# Altium PCB SignalGen_V5_RevC.PcbDoc
Units mm, origin at the board's own origin, x right, y up, seen from the top; angles counter-clockwise.
Board outline 80 x 80 mm, 2 copper layers (Top Layer, Bottom Layer); 43 components, 21 nets, 115 pads, 15 vias.
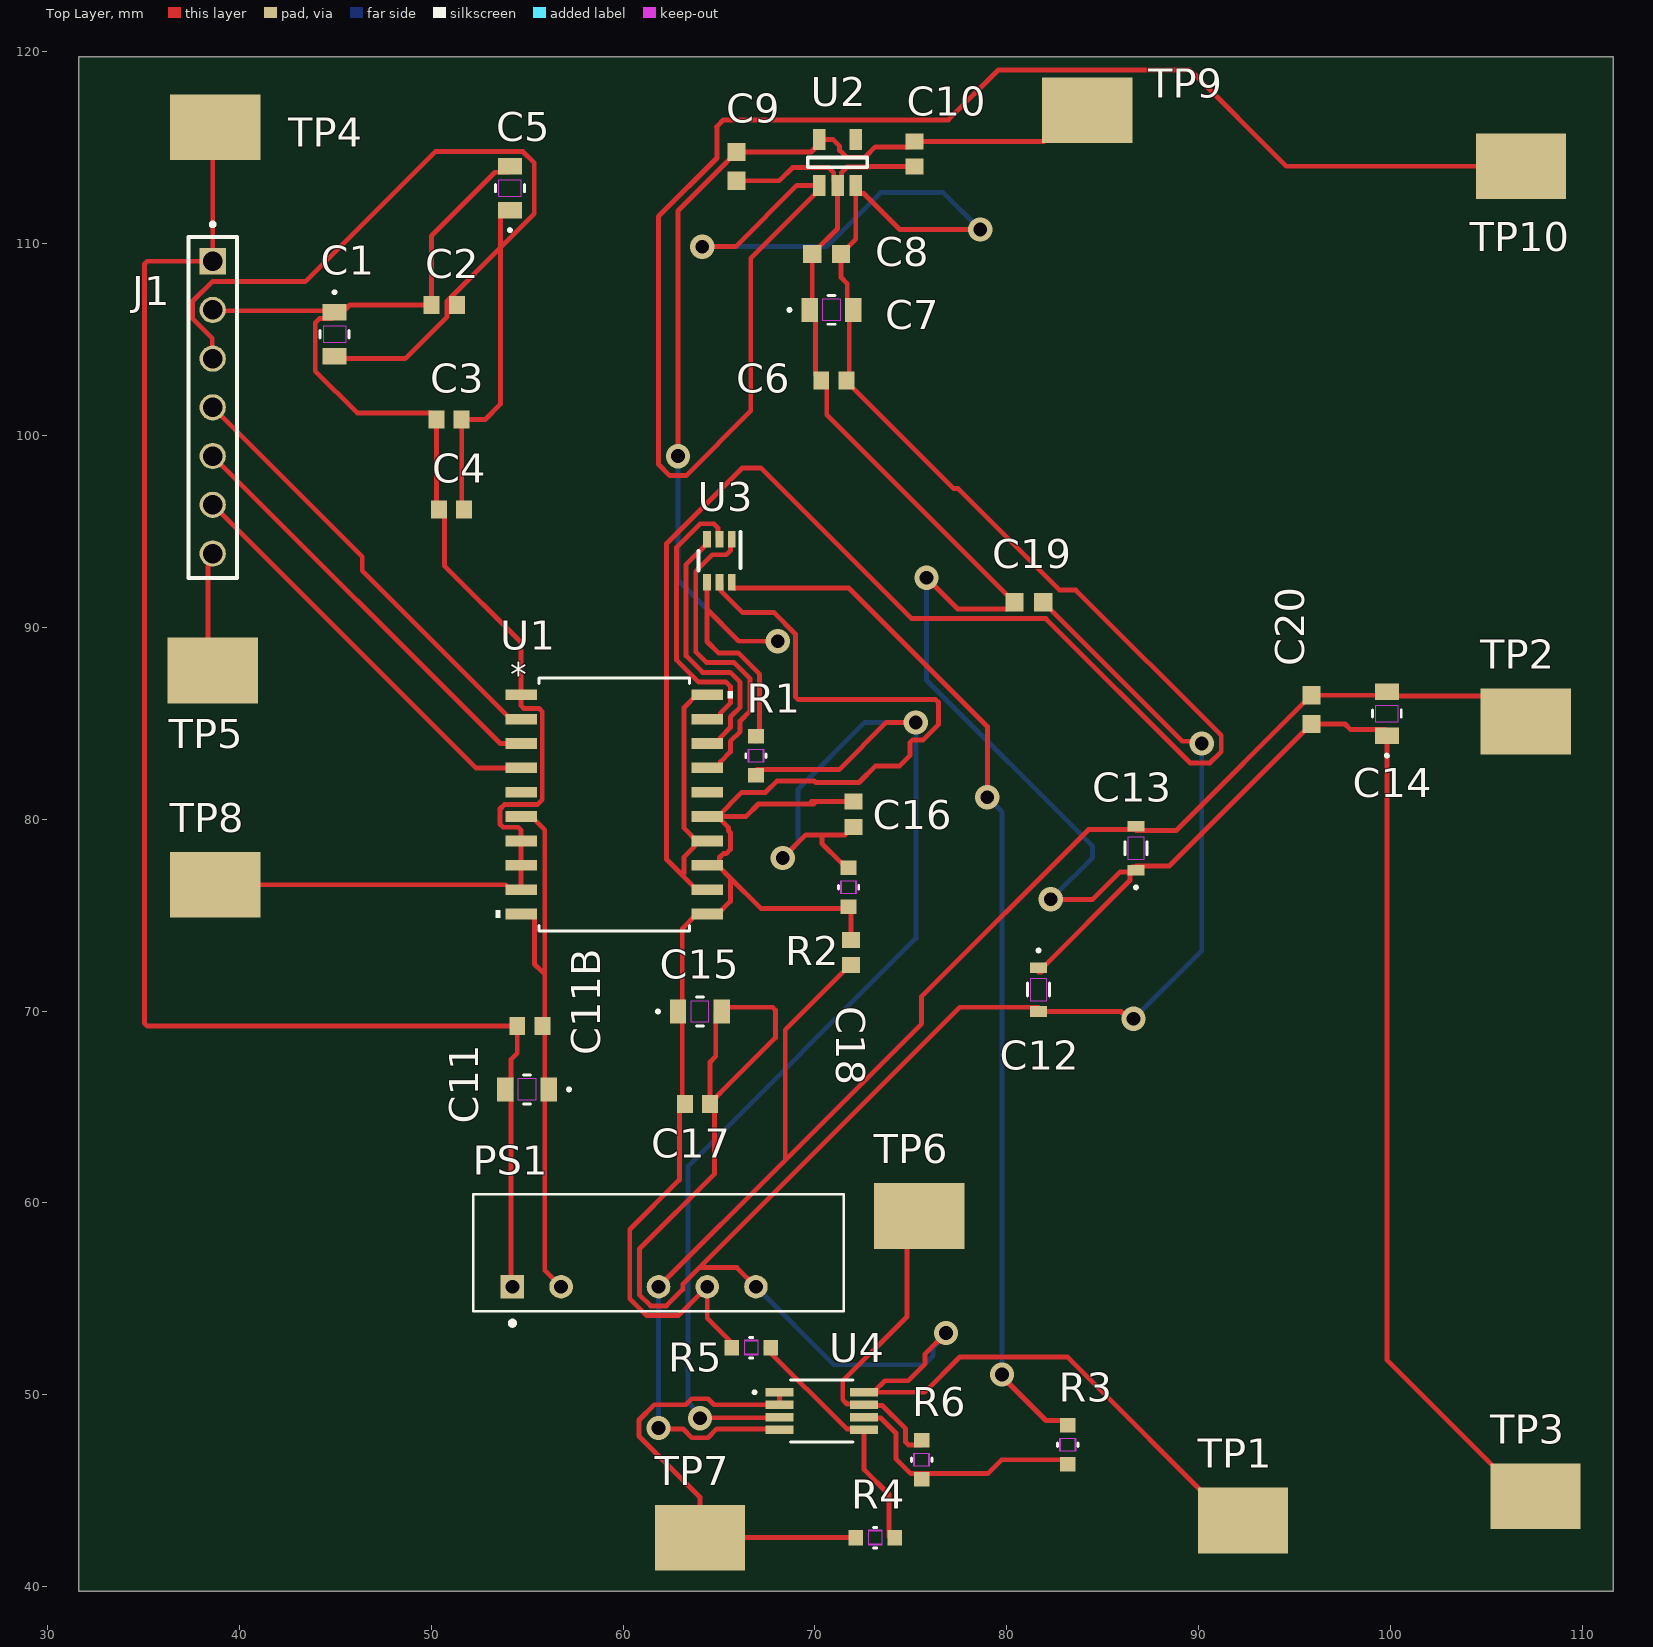
[diagram p0: Top Layer view]
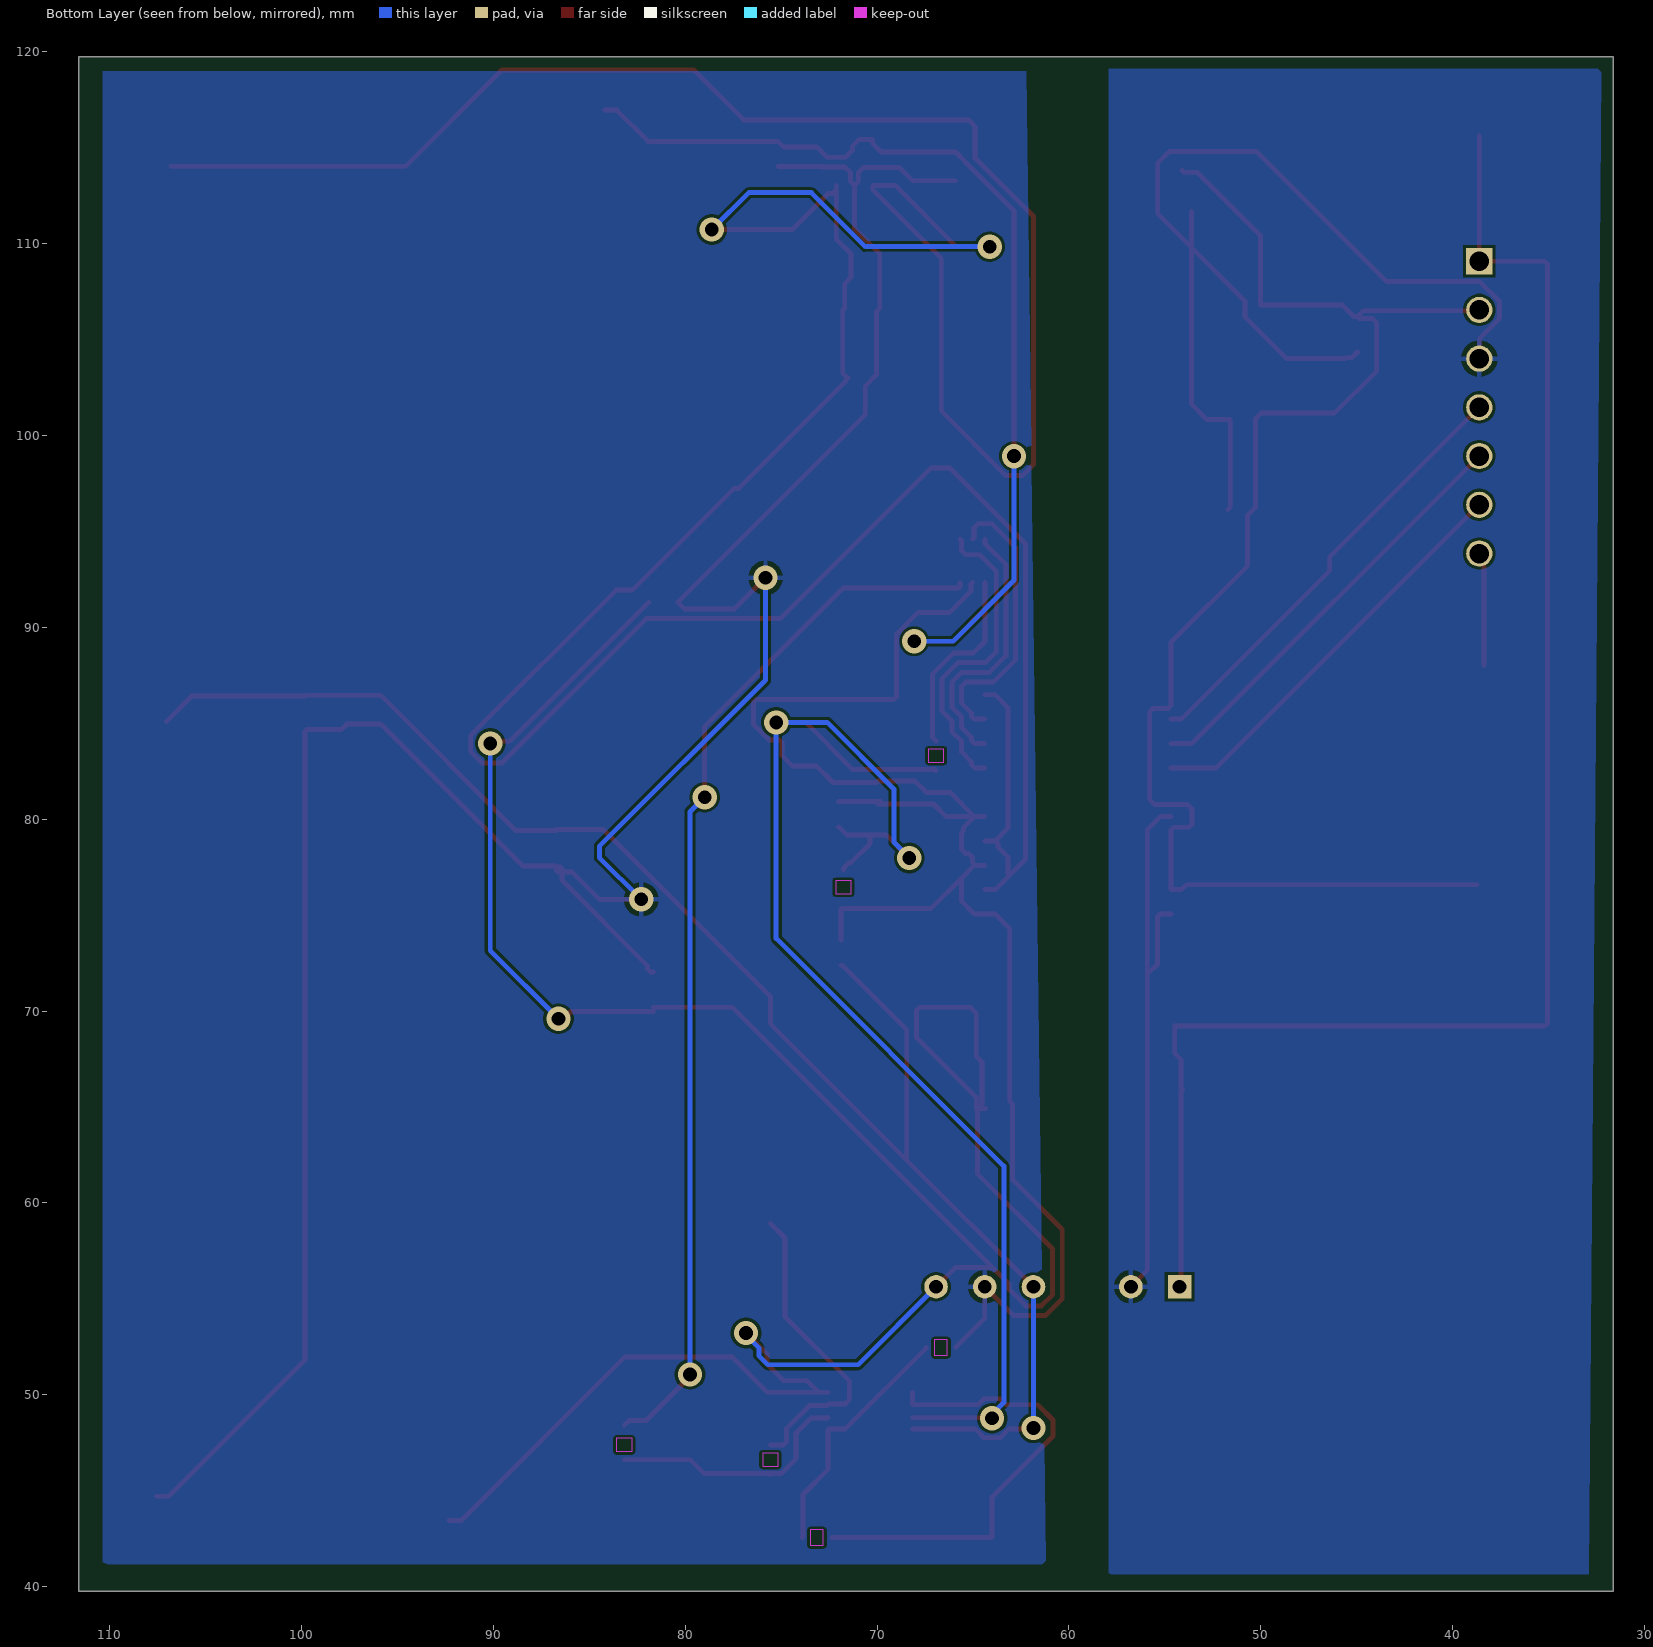
[diagram p1: Bottom Layer view, seen from below]

## Layer stack, top to bottom
Top Solder: solder mask 0.0102, Solder Resist, Dk 3.5
Top Layer: signal copper 0.0356
Dielectric 1: dielectric 0.32, FR-4, Dk 4.8
Bottom Layer: signal copper 0.0356
Bottom Solder: solder mask 0.0102, Solder Resist, Dk 3.5

## Board outline
31.623,39.751 31.623,119.751 111.623,119.751 111.623,39.751

## Design rules (kind name [scope] priority, off if disabled: settings)
Clearance [All] p1: gap=0.15 ignorepadtopadclearanceinfootprint=FALSE
MinimumSolderMaskSliver [All] p1: minsoldermaskwidth=0
PolygonConnect [All] p1: connectstyle=Relief reliefconductorwidth=0.254 reliefentries=4 polygonreliefangle="90 Angle" airgapwidth=0.254
RoutingVias [All] p1: holewidth=0.711 width=1.27 viastyle="Through Hole" minholewidth=0.711 minwidth=1.27 maxholewidth=0.711 maxwidth=1.27
SilkToSilkClearance [All] p1: silktosilkclearance=0.15
SilkToSolderMaskClearance [IsPad] p1: minsilkscreentomaskgap=0.1 clearancetoexposedcopper=TRUE
SolderMaskExpansion [All] p1: expansion=0 istentingtop=FALSE
Width [All] p1: maxlimit=0.254 minlimit=0.254 preferedwidth=0.254
27 further rules are at their usual default settings.

## Classes and differential pairs
component class SignalGen_SingleChannel: C2 C3 C4 C11B C16 C17 C19 C20 J1 PS1 TP1 TP2 TP3 TP4 TP5 TP6 TP7 TP8 TP10 U1 U3 U4

## Components (designator, comment, footprint, x,y, rotation, side; value= is the part's Value field where it differs from the comment)
C1 "10uF" G-21_MUR 44.958,105.283 r270 top
C2 "100nF" CAPC1608X90N 50.673,106.807 r0 top
C3 "100nF SYS" CAPC1608X90N 50.927,100.838 r180 top
C4 "100nF VIO" CAPC1608X90N 51.054,96.139 r0 top
C5 "10 uF SYS" G-21_MUR 54.102,112.903 r90 top
C6 "100nF ISO" CAPC1608X90N 70.993,102.87 r0 top
C7 "10uF ISO" G-21_MUR 70.866,106.553 r0 top
C8 "1uF" INDC1608X90N 70.612,109.474 r0 top
C9 "1uF" INDC1608X90N 65.913,114.034 r90 top
C10 "100nF" CAPC1608X90N 75.184,114.681 r90 top
C11 "10uF" G-21_MUR 54.991,65.913 r180 top
C11B "100nF" CAPC1608X90N 55.143,69.215 r180 top
C12 "470nF" CAP_1608_TDK 81.661,71.12 r270 top
C13 "470nF" CAP_1608_TDK 86.741,78.486 r90 top
C14 "10uF" G-21_MUR 99.822,85.506 r90 top
C15 "10uF" G-21_MUR 64.008,69.977 r0 top
C16 "100nF" CAPC1608X90N 72.009,80.264 r90 top
C17 "100nF" CAPC1608X90N 63.881,65.151 r180 top
C18 "100nF" CAPC1608X90N 71.882,73.05 r270 top
C19 "1uF" INDC1608X90N 81.153,91.313 r180 top
C20 "1uF" INDC1608X90N 95.885,85.713 r90 top
J1 "SS-107-T-1A" SAMTEC_SS-107-T-1A 38.608,109.093 r90 top
PS1 "IA0305S" XP_IA0305S 54.229,55.626 r0 top
R1 "10K" RC0603N_YAG 66.929,83.312 r270 top
R2 "10K" RC0603N_YAG 71.755,76.454 r270 top
R3 "10K" RC0603N_YAG 83.185,47.384 r270 top
R4 "10K" RC0603N_YAG 73.139,42.545 r0 top
R5 "20K" RC0603N_YAG 66.675,52.451 r180 top
R6 "20K" RC0603N_YAG 75.565,46.609 r270 top
TP1 "+ISO_P5V" KEYSTONE_5016 92.329,43.434 r0 top
TP2 "-ISO_N5V" KEYSTONE_5016 107.061,85.09 r0 top
TP3 "ISO_GND_ISOW" KEYSTONE_5016 107.569,44.704 r0 top
TP4 "VBUS_5V" KEYSTONE_5016 38.735,116.078 r0 top
TP5 "Fault_TP" KEYSTONE_5016 38.608,87.757 r0 top
TP6 "Bi_PolarOut" KEYSTONE_5016 75.438,59.309 r0 top
TP7 "VREF_MID_TP" KEYSTONE_5016 64.008,42.545 r0 top
TP8 "TP_SYS_3V3" KEYSTONE_5016 38.735,76.581 r0 top
TP9 "TP_ISO_3V3_CLEAN" KEYSTONE_5016 84.201,116.967 r0 top
TP10 "TP_ISO_3V3_RAW" KEYSTONE_5016 106.807,114.046 r0 top
U1 "ISOW7741DFM" SOIC20_DFM_TEX 59.538,80.772 r0 top
U2 "TLV70233DBVT" DBV0005A_N 71.181,114.243 r90 top
U3 "DAC8411IDCKT" DCK0006A_N 65.024,93.472 r270 top
U4 "OPA2192IDGKR" DGK0008A_N_TEX 70.358,49.149 r0 top

## Footprints (in the part's own frame and the unit in brackets; to place one, negate y for a bottom-side part, rotate by r counter-clockwise, add the part's x,y. Pads: shape width x height; smd on the part's side, far side on the other; paste and mask are expansions set on the pad)
CAP_1608_TDK [mil]
  rect 21.78x35 smd paste+0 mask+0: 1(-45,0) 2(45,0)
  Top Layer keep-out region: -23.5,-15.5 -23.5,15.5 23.5,15.5 23.5,-15.5
  silkscreen extent -83,-23 13,23, body extent -34,-17 34,17, height 35
CAPC1608X90N [mm]
  rect 0.83x0.94 smd: 1(-0.66,0) 2(0.66,0)
DBV0005A_N [mm]
  rect 1.1x0.65 smd paste-0.102 mask+0.051: 1(-1.2,0.95) 2(-1.2,0) 3(-1.2,-0.95) 4(1.2,-0.95) 5(1.2,0.95)
  silkscreen extent -0.25,-1.55 0.25,1.55
DCK0006A_N [mm]
  rect 0.85x0.4 smd paste+0 mask+0.051: 1(-1.125,0.65) 2(-1.125,0) 3(-1.125,-0.65) 4(1.125,-0.65) 5(1.125,0) 6(1.125,0.65)
  silkscreen extent -1.5,-1.09 0.51,1.09
DGK0008A_N_TEX [mm]
  rect 1.448x0.457 smd paste+0 mask+0.051: 1(-2.2,0.975) 2(-2.2,0.325) 3(-2.2,-0.325) 4(-2.2,-0.975) 5(2.2,-0.975) 6(2.2,-0.325) 7(2.2,0.325) 8(2.2,0.975)
  silkscreen extent -3.58,-1.63 1.63,1.63, body extent -2.57,-1.5 2.57,1.5, height 1.09
G-21_MUR [mil]
  rect 33.78x49 smd paste+0 mask+0: 1(-45,0) 2(45,0)
  Top Layer keep-out region: -17.5,-22.5 -17.5,22.5 17.5,22.5 17.5,-22.5
  silkscreen extent -89,-30 7,30, body extent -39,-24 39,24, height 57
INDC1608X90N [mm]
  rect 0.95x0.95 smd: 1(-0.75,0) 2(0.75,0)
KEYSTONE_5016 [mm]
  rect 4.7x3.43 smd: TP(0,0)
  body extent -1.91,-1.42 1.91,1.42, height 2.29
RC0603N_YAG [mil]
  rect 30x32 smd paste+0 mask+0: 1(-40,0) 2(40,0)
  Top Layer keep-out region: -13.5,-14 -13.5,14 13.5,14 13.5,-14
  Keep-Out Layer region: -13.5,-16 -13.5,16 13.5,16 13.5,-16
  silkscreen extent -3,-21 3,21, body extent -31,-16 31,16, height 28
SAMTEC_SS-107-T-1A [mil]
  rect 53.78x53.78 hole 40: 01(0,0)
  round 53.78 hole 40: 02(-100,0) 03(-200,0) 04(-300,0) 05(-400,0) 06(-500,0) 07(-600,0)
  silkscreen extent -650,-50 80,50
SOIC20_DFM_TEX [mil]
  rect 65x22 smd paste+0 mask+0: 1(-191,225) 2(-191,175) 3(-191,125) 4(-191,75) 5(-191,25) 6(-191,-25) 7(-191,-75) 8(-191,-125) 9(-191,-175) 10(-191,-225) 11(191,-225) 12(191,-175) 13(191,-125) 14(191,-75) 15(191,-25) 16(191,25) 17(191,75) 18(191,125) 19(191,175) 20(191,225)
  silkscreen extent -244,-260 244,260, body extent -209,-254 209,254, height 140
XP_IA0305S [mm]
  rect 1.228x1.228 hole 0.72: 1(0,0)
  round 1.228 hole 0.72: 2(2.54,0) 4(7.62,0) 5(10.16,0) 6(12.7,0)
  silkscreen extent -2.03,-2.02 17.27,4.82

## Part data
C1 C5 C7 C11 C14 C15: library part GRM21BR61E106KA73L, "Description", Manufacturer_Name=Murata, Copyright="Copyright (C) 2025 Ultra Librarian. All rights reserved.", Manufacturer_Part_Number=GRM21BR61E106KA73L
C2 C3 C4 C6 C10 C11B C16 C17 C18: library part CC0603KRX7R8BB104, "Cap Ceramic 0.1uF 25V X7R 10% Pad SMD 0603 125C T/R", Manufacturer_Name=YAGEO, Mouser Part Number=603-CC603KRX7R8BB104, Datasheet Link=https://www.arrow.com/en/products/cc0603krx7r8bb104/yageo?region=nac, Geometry.Height=0.9mm, Manufacturer_Part_Number=CC0603KRX7R8BB104, Mouser Price/Stock=https://www.mouser.co.uk/ProductDetail/YAGEO/CC0603KRX7R8BB104?qs=AgBp2OyFlx%252B4QOgEm%2Fb3YQ%3D%3D
C8 C9 C19 C20: library part MBASE168SB7105KTNA18, "Taiyo Yuden CAP, MLCC, 0603, 16V, X7R, 1 uF 10 %, T&R", Manufacturer_Name="TAIYO YUDEN", Datasheet Link=https://ds.yuden.co.jp/TYCOMPAS/ut/specSheet?pn=MBASE168SB7105KTNA18, Geometry.Height=0.9mm, Manufacturer_Part_Number=MBASE168SB7105KTNA18
C12 C13: library part C1608X7R1H474K080AC, "CAPACITOR; SMT (0603); CERAMIC CHIP; 0.47UF; 50V; TOL=10%; TG=-55 DEGC TO +125 DEGC; TC=X7R; AUTO", Manufacturer_Name=TDK, Copyright="Copyright (C) 2026 Ultra Librarian. All rights reserved.", Manufacturer_Part_Number=C1608X7R1H474K080AC
J1: Package=None, Availability=Unavailable, MP=SS-107-T-1A, Price=None
PS1: "DC DC CONVERTER +/-5V 1W", Package=None, Availability=Unavailable, MP=IA0305S, Price=None
R1 R2 R3 R4: library part RC0603FR-0710KL, "RES SMD 10kO 1% 1/10W 0603", Manufacturer_Name=Yageo, Copyright="Copyright (C) 2025 Ultra Librarian. All rights reserved.", Manufacturer_Part_Number=RC0603FR-0710KL
R5 R6: library part RC0603FR-0720KL, "Description", Manufacturer_Name=Yageo, Copyright="Copyright (C) 2025 Ultra Librarian. All rights reserved.", Manufacturer_Part_Number=RC0603FR-0720KL
TP1 TP2 TP3 TP4 TP5 TP6 TP7 TP8 TP9 TP10: library part 5016, "Test Point Compact SMT Phos Bronze/Silver 1000pc Tape & Reel", Package="NON STANDARD-1 Keystone", Check_prices=https://www.snapeda.com/parts/5016/Keystone/view-part/?ref=eda, MF="Keystone Electronics", MP=5016, SnapEDA_Link=https://www.snapeda.com/parts/5016/Keystone/view-part/?ref=snap
U1: "Low-emissions, low-ripple, quad-channel, 3/1, reinforced digital isolator with integrated power 20-SOIC -40 to 125", Manufacturer_Name="Texas Instruments", Copyright="Copyright (C) 2026 Ultra Librarian. All rights reserved.", Manufacturer_Part_Number=ISOW7741DFM, RefDes=RefDes, Type=Type
U2: "300-mA, high-PSRR, low-IQ, low-dropout voltage regulator with enable 5-SOT-23 -40 to 125", Alternate_PartNumber=TLV70212DBVT, Manufacturer="Texas Instruments", PartNumber=TLV70212DBVR, CompType=IC, Copyright="Copyright (C) 2026 Ultra Librarian. All rights reserved.", Manufacturer_Name="Texas Instruments", Manufacturer_Part_Number=TLV70233DBVT, MountType=SMT, PackageReference=DBV0005A, RefDes=RefDes, RoHS=Y, Type=TYPE
U3: "16bit, Single Channel, 80uA, 2.0V-5.5V DAC in SC70 Package 6-SC70 -40 to 125", Manufacturer="Texas Instruments", PartNumber=DAC8411IDCKR, Alternate_PartNumber=DAC8411IDCKT, CompType=IC, Copyright="Copyright (C) 2025 Ultra Librarian. All rights reserved.", Manufacturer_Name="Texas Instruments", Manufacturer_Part_Number=DAC8411IDCKT, MountType=SMT, PackageReference=DCK0006A, RefDes=RefDes, RoHS=Y, Type=TYPE
U4: "36-V, Precision, RRIO, Low Offset Voltage, Low Input Bias Current Op Amp With e-trim 8-VSSOP -40 to 125", Manufacturer_Name="Texas Instruments", Copyright="Copyright (C) 2025 Ultra Librarian. All rights reserved.", Manufacturer_Part_Number=OPA2192IDGKR, RefDes=RefDes, Type=Type

## Via types
v1: diameter 1.27, hole 0.711, Top Layer to Bottom Layer, 15 vias

## Nets (pads, with @x,y where several pads share a name; then routed paths per layer and width w, separated by ;. In a path a pad name is that pad's centre, name@x,y a point inside that pad or via, vN(x,y) a via of type N, cw(c..) or ccw(c..) an arc to the next point about the centre after c; other vN are vias at no path point)
BIPOLAR_OUT: R6.1 TP6.TP U4.7 | length 16.4
  Top Layer w0.254: R6.1@75.565,47.384 74.877,47.384 74.728,47.532 74.728,48.213 73.508,49.434 72.598,49.434 U4.7 72.518,49.514 71.676,49.514 71.453,49.738 71.453,50.721 74.803,54.071 74.803,58.166 TP6.TP@75.565,58.928
CS_ISO: U1.17 U3.1 | length 16.4
  Top Layer w0.254: U1.17 64.935,82.677 65.087,82.829 65.087,83.002 65.596,83.51 65.596,84.061 66.103,84.569 66.103,85.121 66.611,85.629 66.611,86.311 66.611,87.345 65.793,88.163 64.759,88.163 64.356,88.163 63.793,88.727 63.793,92.93 64.654,93.791 65.382,93.791 65.605,94.014 65.605,94.528 U3.1
DAC_OUT_UNIPOLAR: R3.1 U3.6 | length 55.3
  Top Layer w0.254: U3.6 65.674,92.122 65.747,92.049 71.781,92.049 78.994,84.836 v1(78.994,81.153) ; v1(79.756,51.054) 79.756,50.948 82.05,48.654 82.931,48.654 R3.1
  Bottom Layer w0.254: v1(78.994,81.153) 79.756,80.391 v1(79.756,51.054)
FAULT_TO_PICO: J1.07 TP5.TP | length 5.9
  Top Layer w0.254: TP5.TP@38.354,88.011 38.354,93.148 38.395,93.189 38.395,93.64 J1.07
IN+_B: R4.2 R5.1 U4.5 | length 13.1
  Top Layer w0.254: R5.1@67.45,52.451 67.45,52.426 71.661,48.214 72.518,48.214 U4.5 72.558,46.101 73.863,44.796 73.863,42.596 R4.2@73.914,42.545
IN-_B: R3.2 R6.2 U4.6 | length 13
  Top Layer w0.254: U4.6 72.598,48.784 73.44,48.784 74.22,48.003 74.22,46.666 75.001,45.885 75.514,45.885 75.565,45.834 75.616,45.885 79.013,45.885 79.737,46.609 R3.2@83.185,46.609
ISO_3V3_CLEAN: C9.2 C10.2 R1.1 TP9.TP U2.5 U3.4 | length 64.8
  Top Layer w0.254: v1(62.865,98.933) 62.865,111.725 65.405,114.265 65.405,114.276 C9.2 69.797,114.784 70.231,115.218 U2.5 70.937,115.443 71.293,115.087 71.293,114.868 71.648,114.512 72.614,114.512 73.155,115.053 74.896,115.053 C10.2 81.94,115.341 83.566,116.967 TP9.TP ; U3.4 64.374,90.947 ; R1.1@66.929,84.087 67.12,84.277 67.12,87.555 66.004,88.671 64.969,88.671 64.374,89.267 64.374,90.947 ; v1(68.072,89.281) 66.04,89.281 64.374,90.947
  Bottom Layer w0.254: v1(62.865,98.933) 62.865,92.456 66.04,89.281 v1(68.072,89.281)
ISO_3V3_RAW: C6.2 C7.2 C8.2 TP10.TP U1.12 U1.14 U1.20 U2.1 U2.3 | length 221.6
  Top Layer w0.254: 63.182,77.16 63.182,78.034 63.691,78.542 63.691,78.715 U1.14@63.843,78.867 ; v1(64.135,109.855) 65.871,109.855 69.059,113.043 U2.1 70.231,112.818 66.659,109.246 66.659,101.291 63.286,97.917 62.444,97.917 61.849,98.512 61.849,111.427 64.897,114.475 64.897,116.078 64.875,116.1 65.234,116.459 76.962,116.459 79.566,119.063 89.566,119.063 94.583,114.046 TP10.TP ; U1.12 63.843,76.327 62.269,77.901 62.269,94.374 66.203,98.308 67.195,98.308 75.046,90.457 82.041,90.457 89.567,82.931 90.591,82.931 91.186,83.526 91.186,84.368 83.608,91.946 82.759,91.946 77.468,97.236 77.232,97.236 71.653,102.815 C6.2 ; U1.14 U1.14@63.843,78.867 ; U1.20 63.843,86.487 63.182,85.827 63.182,79.527 U1.14@63.843,78.867 ; C6.2@71.526,102.997 71.79,103.261 71.79,106.553 71.691,106.652 71.691,107.922 71.362,108.252 C8.2 72.131,110.243 U2.3 72.131,112.818 72.329,112.62 72.554,112.62 74.43,110.744 v1(78.613,110.744)
  Bottom Layer w0.254: v1(64.135,109.855) 70.612,109.855 73.428,112.671 76.686,112.671 v1(78.613,110.744)
ISO_GND_ISOW: C6.1 C7.1 C8.1 C9.1 C10.1 C12.1 C13.1 C14.1 C15.1 C16.2 C17.2 C18.1 C19.2 C20.1 PS1.5 R2.2 R5.2 TP3.TP U1.11 U1.13 U1.15 U2.2 U3.5 | length 222.9
  Top Layer w0.254: U1.13 U1.13@64.877,77.597 ; U1.15 U1.15@64.935,80.137 ; U3.5 65.097,92.274 65.097,91.907 66.221,90.783 67.86,90.783 68.984,89.659 68.984,86.382 69.133,86.233 76.305,86.233 76.454,86.084 76.454,84.943 75.645,84.134 75.102,84.134 74.953,83.985 74.953,83.315 74.419,82.781 73.169,82.781 72.303,81.915 70.051,81.915 69.968,81.998 68.028,81.998 67.428,81.398 66.196,81.398 U1.15@64.935,80.137 ; R5.2@65.9,52.451 65.9,52.476 64.389,53.988 PS1.5 62.886,54.123 61.226,54.123 60.346,55.003 60.346,58.612 62.933,61.199 62.933,65.138 63.084,65.288 63.084,74.298 63.843,75.057 U1.11 64.935,75.057 65.596,75.717 65.596,76.937 ; C9.1 68.142,113.284 68.832,113.974 70.714,113.974 70.983,113.705 70.983,113.241 U2.2 ; C6.1@70.206,102.997 70.04,103.162 70.04,106.454 69.862,106.633 C8.1 71.181,110.793 U2.2 ; C6.1 70.621,102.582 70.621,101.095 C19.2 80.055,90.965 77.437,90.965 v1(75.819,92.583) ; C18.1 71.882,75.311 71.844,75.349 67.183,75.349 65.596,76.937 ; C16.2 69.825,80.924 69.954,80.795 67.059,80.795 66.401,80.137 U1.15@64.935,80.137 ; C10.1 72.841,114.021 72.824,114.004 71.678,114.004 71.379,113.705 71.379,113.241 U2.2 ; C12.1@81.661,72.044 81.829,72.044 81.978,72.194 81.978,72.362 86.423,76.807 C13.1@86.423,77.256 ; v1(82.296,75.819) 84.479,75.819 85.915,77.256 C13.1@86.423,77.256 ; C13.1 86.654,77.256 C13.1@86.423,77.256 ; C13.1@86.741,77.508 86.52,77.508 86.423,77.412 C13.1@86.423,77.256 ; C13.1@86.741,77.562 88.484,77.562 C20.1 97.639,84.963 97.921,84.681 99.723,84.681 99.822,84.582 C14.1 99.822,51.816 106.934,44.704 TP3.TP ; U1.13@64.877,77.597 65.029,77.749 65.029,78.003 65.233,78.207 65.372,78.207 65.596,78.43 65.596,79.304 65.488,79.412 65.488,79.585 U1.15@64.935,80.137 ; U1.13@64.877,77.597 64.935,77.597 65.596,76.937
  Bottom Layer w0.254: v1(75.819,92.583) 75.819,87.249 84.477,78.591 84.477,78 v1(82.296,75.819)
ISO_N5V: C13.2 C14.2 C18.2 C20.2 PS1.4 TP2.TP U4.4 | length 85.1
  Top Layer w0.254: v1(61.849,48.26) 61.895,48.214 63.125,48.214 63.587,47.752 64.429,47.752 64.891,48.214 U4.4@68.158,48.214 ; PS1.4 68.453,62.23 ; C18.2 71.827,72.39 68.453,69.016 68.453,62.23 ; C13.2@86.741,79.41 88.832,79.41 C20.2 99.79,86.463 99.822,86.431 105.72,86.431 TP2.TP ; C13.2@86.741,79.464 84.27,79.464 75.567,70.76 75.567,69.344 68.453,62.23
  Bottom Layer w0.254: v1(61.849,48.26) PS1.4
ISO_P5V: C12.2 C15.2 C17.1 C19.1 PS1.6 TP1.TP U4.8 | length 132
  Top Layer w0.254: C17.1@64.357,64.912 64.829,64.912 64.829,65.494 65.043,65.708 65.049,65.708 67.945,68.604 67.945,70.047 67.796,70.196 65.151,70.196 64.834,69.878 64.834,67.634 64.541,67.342 C17.1 64.761,64.931 64.761,61.5 60.854,57.593 60.854,55.214 61.437,54.631 62.261,54.631 63.119,55.489 63.119,55.763 63.977,56.621 ; PS1.6 65.934,56.621 63.977,56.621 ; U4.8 U4.8@73.053,50.124 ; v1(76.835,53.213) 75.749,52.127 75.749,51.619 74.858,50.728 73.657,50.728 U4.8@73.053,50.124 ; C12.2 85.958,69.977 86.339,69.596 v1(86.614,69.596) ; C12.2@81.661,70.196 77.552,70.196 63.977,56.621 ; C19.1 89.154,84.062 90.055,84.062 v1(90.17,83.947) ; TP1.TP 91.694,43.434 83.162,51.966 77.565,51.966 75.723,50.124 U4.8@73.053,50.124
  Bottom Layer w0.254: PS1.6 70.993,51.562 75.692,51.562 76.166,52.036 76.166,52.445 76.835,53.114 v1(76.835,53.213) ; v1(86.614,69.596) 90.17,73.152 v1(90.17,83.947)
MID_RAW: C16.1 R1.2 R2.1 U4.3 | length 73.3
  Top Layer w0.254: v1(64.008,48.768) 64.036,48.796 68.13,48.796 U4.3 ; R1.2@66.929,82.537 66.98,82.588 71.264,82.588 73.722,85.046 v1(75.267,85.046) ; v1(68.326,77.978) 69.529,79.181 70.276,79.181 ; R2.1@71.755,77.343 71.755,77.445 71.476,77.724 71.374,77.724 70.37,78.728 70.37,79.087 70.276,79.181 ; C16.1 71.586,79.181 70.37,79.181 70.276,79.181
  Bottom Layer w0.254: v1(64.008,48.768) 64.008,48.977 63.394,49.591 63.394,61.913 75.267,73.786 v1(75.267,85.046) ; v1(68.326,77.978) 68.326,78.003 69.122,78.799 69.122,81.568 72.6,85.046 75.101,85.046 v1@75.184,84.963
MOSI_ISO: U1.18 U3.3 | length 14.1
  Top Layer w0.254: U3.3 64.374,94.372 63.285,93.283 63.285,88.516 64.146,87.655 64.548,87.655 65.583,87.655 66.103,87.135 66.103,86.1 66.103,85.839 65.596,85.331 65.596,84.78 65.087,84.272 65.087,84.099 64.935,83.947 U1.18
SCLK_ISO: U1.19 U3.2 | length 15.2
  Top Layer w0.254: U1.19 64.935,85.217 65.087,85.369 65.087,85.542 65.596,86.05 65.596,86.924 65.372,87.147 64.338,87.147 63.935,87.147 62.777,88.306 62.777,94.164 64.016,95.403 64.732,95.403 64.955,95.18 64.955,94.666 U3.2
SPI_CS_SYS: J1.06 U1.4 | length 21.8
  Top Layer w0.254: J1.06 52.324,82.677 U1.4
SPI_MOSI_SYS: J1.05 U1.3 | length 22.3
  Top Layer w0.254: J1.05 53.594,83.947 U1.3
SPI_SCLK_SYS: J1.04 U1.2 | length 23.2
  Top Layer w0.254: J1.04 46.404,93.677 46.404,92.953 54.14,85.217 U1.2
SYS_3V3: C1.1 C2.1 C3.2 C4.1 C5.2 J1.02 TP8.TP U1.1 U1.7 U1.8 U1.9 | length 78.1
  Top Layer w0.254: J1.02 38.652,106.509 44.656,106.509 C1.1@44.958,106.207 ; TP8.TP 53.886,76.581 54.14,76.327 U1.9 U1.8 U1.7 54.686,79.432 54.537,79.581 53.746,79.581 53.584,79.743 53.584,80.531 53.825,80.772 55.548,80.772 55.789,81.013 55.789,85.611 55.626,85.773 54.835,85.773 54.686,85.922 U1.1 54.686,89.216 50.682,93.22 50.682,95.851 C4.1 50.267,96.266 C3.2 50.267,100.893 49.979,101.181 46.139,101.181 43.955,103.365 43.955,105.885 44.178,106.108 44.859,106.108 C1.1@44.958,106.207 ; C5.2@54.102,113.827 54.003,113.728 53.322,113.728 50.013,110.42 C2.1 45.751,106.807 45.151,106.207 C1.1@44.958,106.207
SYS_GND: C1.2 C2.2 C3.1 C4.2 C5.1 C11.1 C11B.1 J1.03 PS1.2 U1.6 U1.10 | length 88.2
  Top Layer w0.254: J1.03 38.579,104.042 38.579,105.077 37.544,106.112 37.544,106.994 38.579,108.029 43.427,108.029 50.206,114.808 54.783,114.808 55.372,114.219 55.372,111.564 53.607,109.799 ; C1.2@44.958,104.359 45.26,104.057 45.558,104.057 45.602,104.013 48.643,104.013 50.825,106.195 50.825,107.017 51.001,107.194 53.607,109.799 ; C4.2 51.587,96.266 C3.1 52.81,100.838 53.607,101.634 53.607,109.799 ; C5.1@53.607,111.677 53.607,109.799 ; U1.10 55.232,75.057 55.385,74.905 55.385,72.44 55.803,72.022 ; U1.6 55.232,80.137 55.915,79.454 55.915,72.022 55.915,69.215 55.915,65.913 55.915,56.48 PS1.2
VBUS_5V: C11.2 C11B.2 J1.01 PS1.1 TP4.TP | length 83.1
  Top Layer w0.254: TP4.TP@38.608,115.654 J1.01 35.201,109.093 35.052,108.944 35.052,69.364 35.201,69.215 C11B.2 54.483,67.799 54.165,67.481 54.165,66.012 54.067,65.913 54.165,65.814 54.165,55.689 PS1.1
VREF_MID: R4.1 TP7.TP U4.1 U4.2 | length 24.4
  Top Layer w0.254: U4.1 U4.2 64.739,49.474 64.429,49.784 63.587,49.784 63.277,49.474 61.626,49.474 60.833,48.681 60.833,47.839 64.008,44.664 TP7.TP R4.1@72.365,42.545
pads on no net: U1.5 U1.16 U2.4

## Polygon pours and split planes (outlines as drawn)
ISO_GND_ISOW on Bottom Layer "ISO_GND_ISOW_L02_P002" (solid, remove dead copper, pour order 2): 62.23,118.999 110.363,118.999 110.363,41.148 110.236,41.021 110.109,41.148 61.214,41.148
SYS_GND on Bottom Layer "SYS_GND_L02_P001" (solid, remove dead copper, pour order 1): 32.258,119.126 57.912,119.126 57.912,40.513 57.785,40.64 32.893,40.64

## Text inside footprints (layer, text, board x,y; h text height)
U1: Top Overlay "*" at 54.115,86.919 h1.27; Mechanical 13 "*" at 55.804,85.89 h1.27